# Altium PCB DCDC_SAUVC26.PcbDoc
Units mm, origin at the board's own origin, x right, y up, seen from the top; angles counter-clockwise.
Board outline 75 x 70 mm, 2 copper layers (Top Layer, Bottom Layer), stack 1.571 mm thick; 96 components, 44 nets, 294 pads, 153 vias.
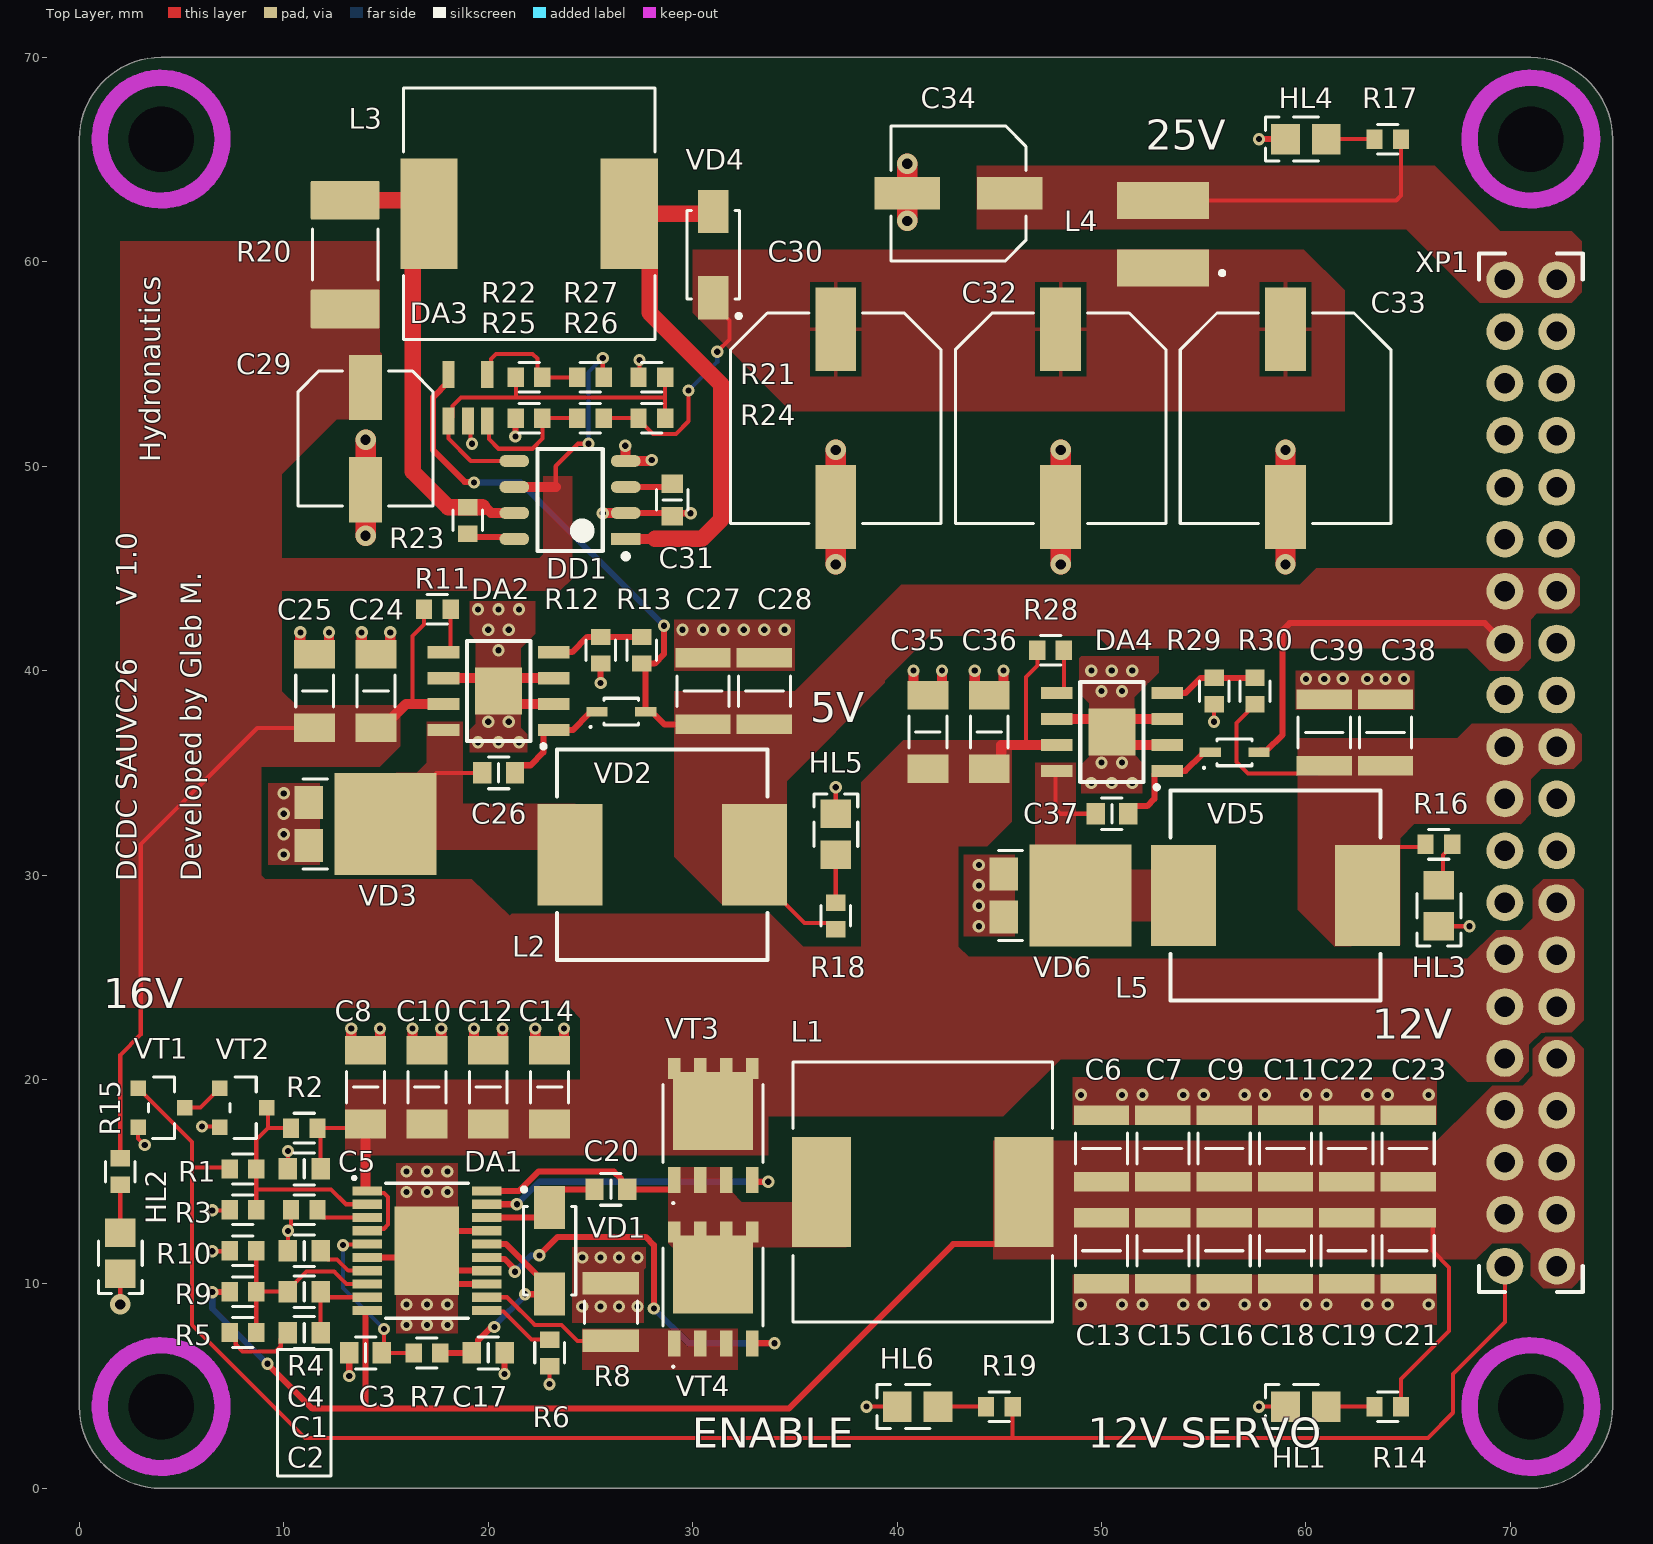
[diagram p0: Top Layer view]
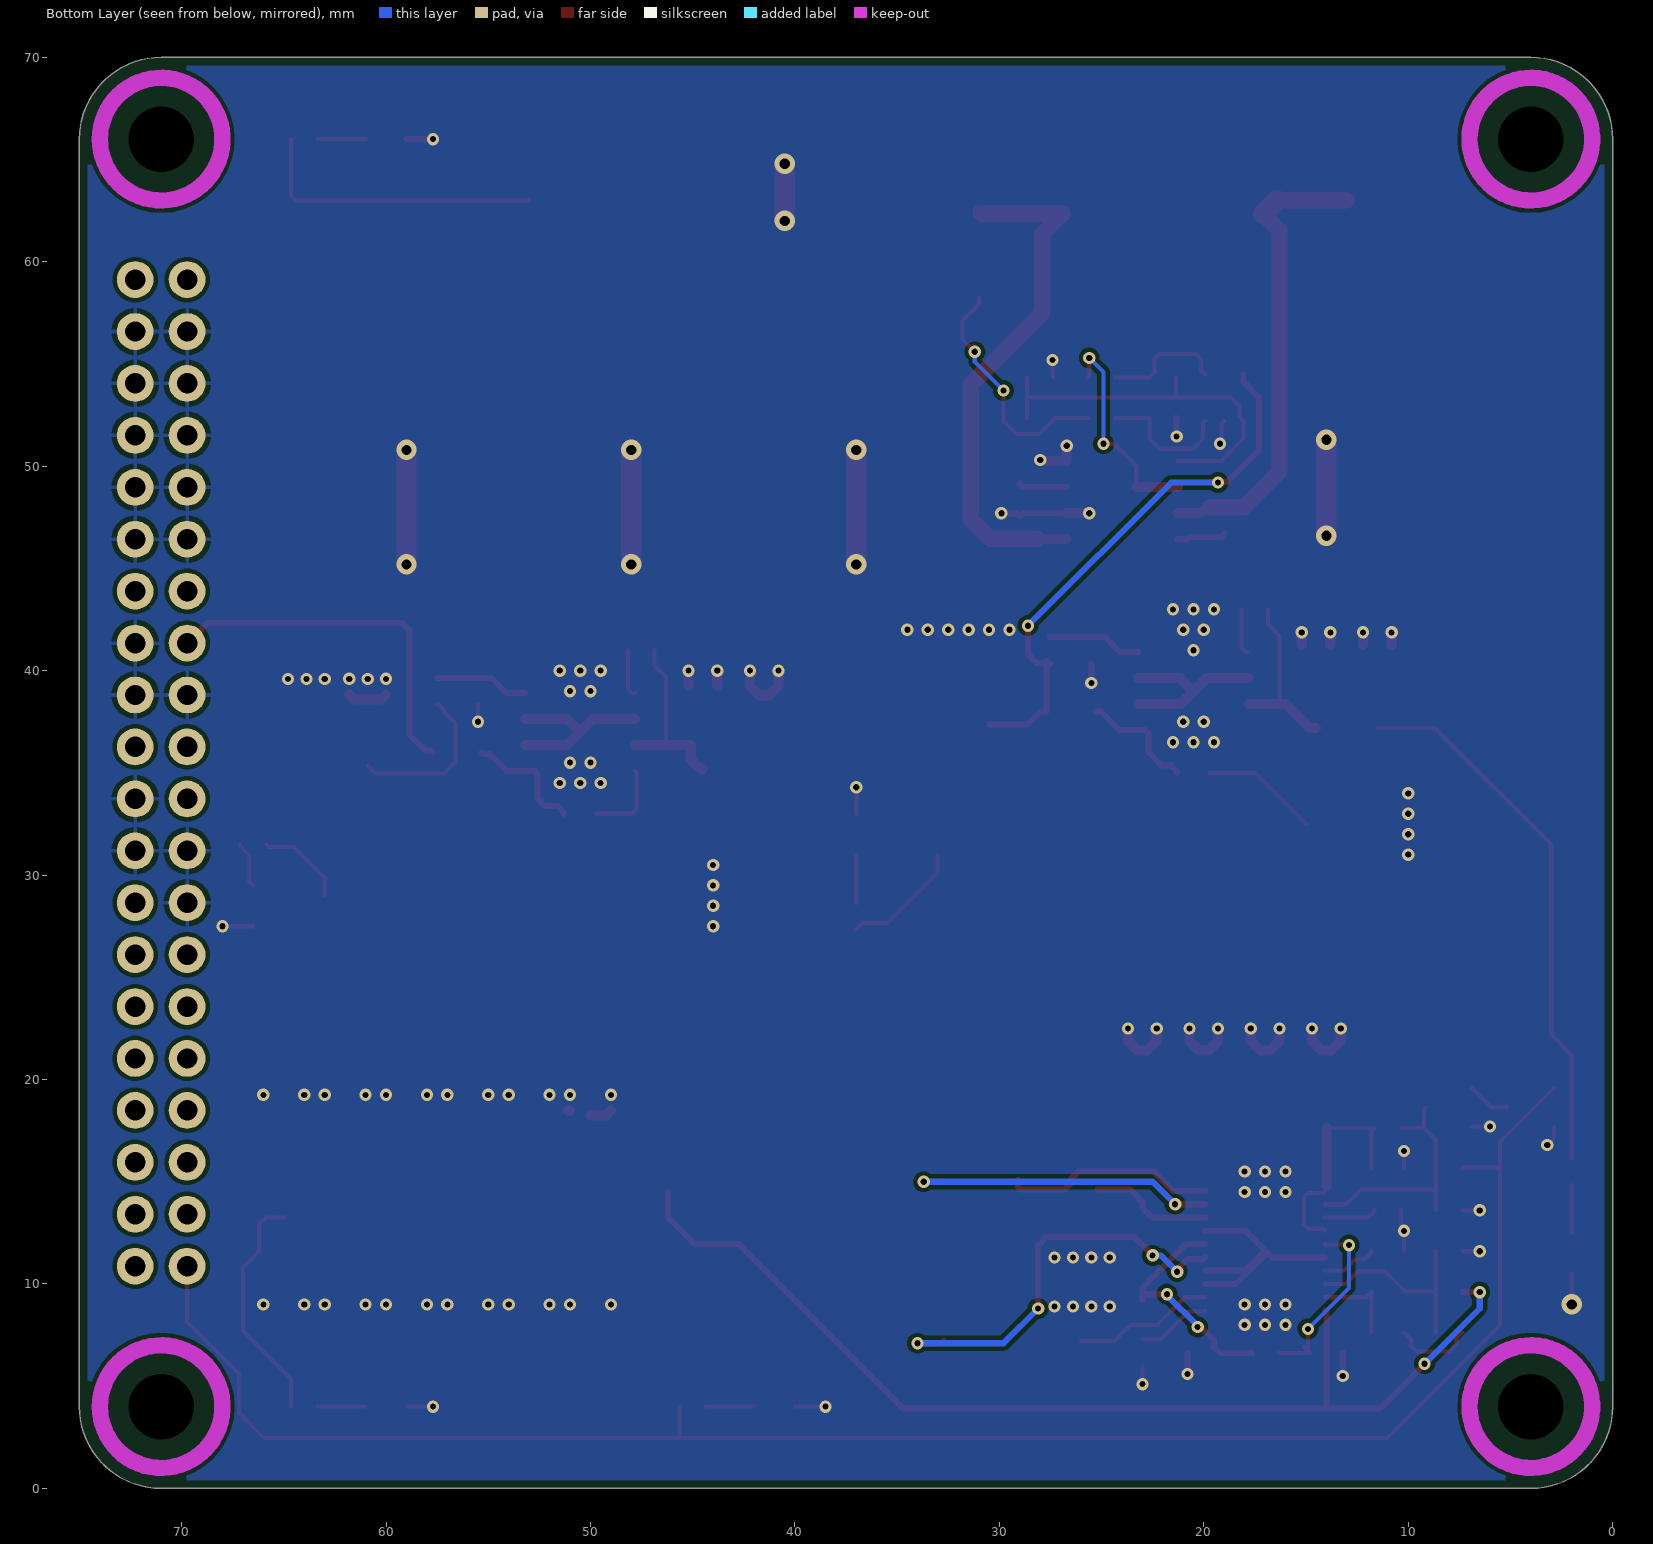
[diagram p1: Bottom Layer view, seen from below]

## Layer stack, top to bottom
Top Solder: solder mask 0.0102, Solder Resist, Dk 3.5
Top Layer: signal copper 0.0356
Dielectric 1: core 1.5, FR4, Dk 4.6
Bottom Layer: signal copper 0.0356
Bottom Solder: solder mask 0.0102, Solder Resist, Dk 3.5

## Board outline
4,0 cw(c4,4) 0,4 0,66 cw(c4,66) 4,70 71,70 cw(c71,66) 75,66 75,4 cw(c71,4) 71,0

## Design rules (kind name [scope] priority, off if disabled: settings)
AcuteAngle [All] p1: minimum=3.50000000000000E+0001 checktracksonly=FALSE
BoardOutlineClearance "BoardOutlineClearance 2" [All] p1: gap=0.4 ignorepadtopadclearanceinfootprint=FALSE except(0: Arc-SplitContinuation Track-SplitContinuation SMDPad-SplitContinuation THPad-SplitContinuation Via-SplitContinuation Fill-SplitContinuation Poly-SplitContinuation Region-SplitContinuation Text-SplitContinuation) // V-Cut
Clearance "Clearance-1 1 Oz" [All] p1: gap=0.2 ignorepadtopadclearanceinfootprint=FALSE except(0.25: Arc-Hole Track-Hole SMDPad-Hole THPad-Hole Via-Hole Fill-Hole Poly-Hole Region-Hole Text-Hole) // Standart
DiffPairsRouting "DiffPairsRouting 1 Oz" [All] p1: maxlimit=0.254 minlimit=0.2 mostfreqgap=0.254 toplayer_minwidth=0.2 toplayer_maxwidth=0.381 toplayer_prefwidth=0.381 bottomlayer_minwidth=0.2 bottomlayer_maxwidth=0.381 bottomlayer_prefwidth=0.381 maxuncoupledlength=12.7
HoleSize "Minimum HoleSize VIA 1" [IsVia] p1: absolutevalues=TRUE maxlimit=5.9 minlimit=0.3 maxpercent=80.000 minpercent=20.000 // Standart
HoleToHoleClearance Hole2HoleClearance [All] p1: gap=0.25 allowstackedmicrovias=FALSE
MinimumAnnularRing "Minimum AR VIA Standart" [IsVia] p1: minimumring=0.15
MinimumAnnularRing "Minimum AR PAD Standart" [IsPAD] p2: minimumring=0.2
MinimumAnnularRing "Minimum AR VIA Advance" [IsVia] p3: minimumring=0.1
MinimumAnnularRing "Minimum AR PAD Advance" [IsPAD] p4: minimumring=0.15
MinimumSolderMaskSliver "SolderMask Bridge Standart" [All] p1: minsoldermaskwidth=0.15 // All Masks
PlaneClearance "PlaneClearance 1 Oz" [All] p1: clearance=0.2
PlaneConnect "TermalConnect-1 1 Oz" [All] p1: pad.planeconnectstyle=Relief pad.reliefexpansion=0.2 pad.reliefentries=4 pad.reliefconductorwidth=0.5 pad.reliefairgap=0.2 via.planeconnectstyle=Direct via.reliefexpansion=0.2 via.reliefentries=4 via.reliefconductorwidth=0.2 via.reliefairgap=0.2 // Standart
PolygonConnect [HasFootprint('ECAP_SMD_10,3x10,3')] p1: thpad.connectstyle=Relief thpad.reliefconductorwidth=0.2 thpad.reliefentries=4 thpad.polygonreliefangle="90 Angle" thpad.airgapwidth=0.25 smdpad.connectstyle=Relief smdpad.reliefconductorwidth=0.2 smdpad.reliefentries=4 smdpad.polygonreliefangle="90 Angle" smdpad.airgapwidth=0.25 via.connectstyle=Direct via.reliefconductorwidth=0.254 via.reliefentries=4 via.polygonreliefangle="90 Angle" via.airgapwidth=0.254
PolygonConnect PolygonConnect_GND [InNet('GND')] p2: thpad.connectstyle=Relief thpad.reliefconductorwidth=0.2 thpad.reliefentries=4 thpad.polygonreliefangle="90 Angle" thpad.airgapwidth=0.25 smdpad.connectstyle=Direct smdpad.reliefconductorwidth=0.2 smdpad.reliefentries=4 smdpad.polygonreliefangle="90 Angle" smdpad.airgapwidth=0.25 via.connectstyle=Direct via.reliefconductorwidth=0.254 via.reliefentries=4 via.polygonreliefangle="90 Angle" via.airgapwidth=0.254
PolygonConnect "PolygonConnect-1 1 Oz" [All] p3: connectstyle=Direct reliefconductorwidth=0.5 reliefentries=4 polygonreliefangle="90 Angle" airgapwidth=0.2 // Standart
RoomDefinition DCDC_12V_Servo [InComponentClass('DCDC_12V_Servo')] p1 off: confinementstyle=ConfineIn formatcopy=TRUE lockcomponents=FALSE outline 2,6 67,6 67,21 2,21
RoomDefinition DCDC_35V [InComponentClass('DCDC_35V')] p2 off: confinementstyle=ConfineIn formatcopy=TRUE lockcomponents=TRUE outline 10,45 64,45 64,69 10,69
RoomDefinition DCDC_12V [InComponentClass('DCDC_12V')] p3 off: confinementstyle=ConfineIn formatcopy=TRUE lockcomponents=TRUE outline 40,24 65,24 65,42 40,42
RoomDefinition DCDC_5V [InComponentClass('DCDC_5V')] p4 off: confinementstyle=ConfineIn formatcopy=TRUE lockcomponents=TRUE outline 10,26 35,26 35,44 10,44
RoomDefinition Connectors [InComponentClass('Connectors')] p5 off: confinementstyle=ConfineIn formatcopy=TRUE lockcomponents=FALSE outline 68,10 74,10 74,62 68,62
RoutingCorners [All] p1 off: cornerstyle=45-Degree minsetback=2.54 maxsetback=2.54
RoutingVias [All] p1: holewidth=0.3 width=0.6 viastyle="Through Hole" minholewidth=0.3 minwidth=0.6 maxholewidth=0.5 maxwidth=1
SilkToSilkClearance Silk2SilkClearance [All] p1 off: silktosilkclearance=0.15
SilkToSolderMaskClearance Silk2SolderMaskClearance [IsPad] p1 off: minsilkscreentomaskgap=0.15 clearancetoexposedcopper=TRUE
SolderMaskExpansion [IsVia] p1: expansion=0.102 istentingtop=TRUE
SolderMaskExpansion "SolderMaskExpansion LDI" [All] p2: expansion=0.025 istentingtop=FALSE // Advance
SupplyNets "Schematic Supply Nets_2" [InNet('+25В')] p1: voltage=0.000
SupplyNets "Schematic Supply Nets_6" [InNet('+16В')] p2: voltage=0.000
SupplyNets "Schematic Supply Nets_5" [InNet('GND')] p3: voltage=0.000
SupplyNets "Schematic Supply Nets_4" [InNet('+12В_servo')] p4: voltage=0.000
SupplyNets "Schematic Supply Nets_3" [InNet('+5В')] p5: voltage=0.000
SupplyNets "Schematic Supply Nets" [InNet('+12В')] p6: voltage=0.000
UnRoutedNet [All] p1: checkbadconnections=TRUE
Width "Width 1 Oz" [All] p1: maxlimit=10 minlimit=0.2 preferedwidth=0.5 checkconnectedcopper=TRUE
20 further rules are at their usual default settings.

## Classes and differential pairs
component class DCDC_12V: C35 C36 C37 C38 C39 DA4 L5 R28 R29 R30 VD5 VD6
component class DCDC_35V: C29 C30 C31 C32 C33 C34 DA3 DD1 L3 L4 R20 R21 R22 R23 R24 R25 R26 R27 VD4
component class Connectors: HL1 HL2 HL3 HL4 HL5 HL6 R14 R15 R16 R17 R18 R19 XP1
component class DCDC_5V: C24 C25 C26 C27 C28 DA2 L2 R11 R12 R13 VD2 VD3
component class DCDC_12V_Servo: C1 C2 C3 C4 C5 C6 C7 C8 C9 C10 C11 C12 C13 C14 C15 C16 C17 C18 C19 C20 C21 C22 C23 DA1 L1 R1 R2 R3 R4 R5 R6 R7 R8 R9 R10 VD1 VT1 VT2 VT3 VT4

## Components (designator, comment, footprint, x,y, rotation, side; value= is the part's Value field where it differs from the comment)
C1 "Capacitor" 0603C 11,9.625 r180 top value="0,01 н"
C2 "Capacitor" 0603C 11,7.625 r180 top value="0,15 н"
C3 "Capacitor" 0603C 14,6.625 r0 top value="0,75 н"
C4 "Capacitor" 0603C 11,11.625 r0 top value="10 н"
C5 "Capacitor" 0603C 11,15.625 r0 top value="0,1 мк"
C6 "Capacitor" 1210C 50,16.625 r270 top value="22 мк"
C7 "Capacitor" 1210C 53,16.625 r270 top value="22 мк"
C8 "Capacitor" 1206C 14,19.625 r270 top value="2,2 мк"
C9 "Capacitor" 1210C 56,16.625 r270 top value="22 мк"
C10 "Capacitor" 1206C 17,19.625 r270 top value="2,2 мк"
C11 "Capacitor" 1210C 59,16.625 r270 top value="22 мк"
C12 "Capacitor" 1206C 20,19.625 r270 top value="2,2 мк"
C13 "Capacitor" 1210C 50,11.625 r90 top value="22 мк"
C14 "Capacitor" 1206C 23,19.625 r270 top value="2,2 мк"
C15 "Capacitor" 1210C 53,11.625 r90 top value="22 мк"
C16 "Capacitor" 1210C 56,11.625 r90 top value="22 мк"
C17 "Capacitor" 0603C 20,6.625 r0 top value="1 мк"
C18 "Capacitor" 1210C 59,11.625 r90 top value="22 мк"
C19 "Capacitor" 1210C 62,11.625 r90 top value="22 мк"
C20 "Capacitor" 0603C 26,14.625 r0 top value="1 мк"
C21 "Capacitor" 1210C 65,11.625 r90 top value="22 мк"
C22 "Capacitor" 1210C 62,16.625 r270 top value="22 мк"
C23 "Capacitor" 1210C 65,16.625 r270 top value="22 мк"
C24 "Capacitor" 1206C 14.509,39 r270 top value="4,7 мк"
C25 "Capacitor" 1206C 11.508,39 r270 top value="4,7 мк"
C26 "Capacitor" 0603C 20.508,35 r0 top value="10 н"
C27 "Capacitor" 1210C 30.508,39 r270 top value="22 мк"
C28 "Capacitor" 1210C 33.509,39 r270 top value="22 мк"
C29 "Capacitor" ECAP_SMD_6,6x6,6 14,51.35 r270 top value="100 мк"
C30 "Capacitor" ECAP_SMD_10,3x10,3 37,52.35 r270 top value="330 мк"
C31 "Capacitor" 0603C 29,48.35 r90 top value="1 н"
C32 "Capacitor" ECAP_SMD_10,3x10,3 48,52.35 r270 top value="330 мк"
C33 "Capacitor" ECAP_SMD_10,3x10,3 59,52.35 r270 top value="330 мк"
C34 "Capacitor" ECAP_SMD_6,6x6,6 43,63.35 r180 top value="100 мк"
C35 "Capacitor" 1206C 41.509,37 r270 top value="4,7 мк"
C36 "Capacitor" 1206C 44.509,37 r270 top value="4,7 мк"
C37 "Capacitor" 0603C 50.509,33 r0 top value="10 н"
C38 "Capacitor" 1210C 63.893,36.979 r270 top value="22 мк"
C39 "Capacitor" 1210C 60.894,36.979 r270 top value="22 мк"
DA1 "LM5116MH" HTSSOP-20 17,11.625 r0 top
DA2 "RT8279GSP" 8SOP(Exposed_Pad) 20.508,39 r180 top
DA3 "TS951ILT" SOt23-5 19,53.35 r90 top
DA4 "RT8279GSP" 8SOP(Exposed_Pad) 50.509,37 r180 top
DD1 "MC3306A" SOIC-8 24,48.35 r180 top
HL1 "LED" 0805D 60,4 r180 top
HL2 "LED" 0805D 2,11.5 r270 top
HL3 "LED" 0805D 66.5,28.5 r270 top
HL4 "LED" 0805D 60,66 r180 top
HL5 "LED" 0805D 37,32 r90 top
HL6 "LED" 0805D 41,4 r180 top
L1 "CDSPRH127-150M" SPRH127 41,14.625 r0 top value="15 мк"
L2 "IHLP4040DZER330M11" IHLP-4040 28.509,31 r0 top value="33 мк"
L3 "CDSPRH127-331M" 12.8x12.8 22,62.35 r0 top value="330 мк"
L4 "CDSP43-1R0M" 4.5x4_wired 53,61.35 r180 top value="1 мк"
L5 "IHLP4040DZER330M11" IHLP-4040 58.509,29 r0 top value="33 мк"
R1 "Resistor" 0603R 8,15.625 r0 top value=N/A
R2 "Resistor" 0603R 11,17.625 r0 top value="33 к"
R3 "Resistor" 0603R 8,13.625 r0 top value="5,6 к"
R4 "Resistor" 0603R 11,13.625 r0 top value="12,4 к"
R5 "Resistor" 0603R 8,7.625 r0 top value="180 к"
R6 "Resistor" 0603R 23,6.625 r270 top value="10 к"
R7 "Resistor" 0603R 17,6.625 r180 top value="470 к"
R8 "Resistor" 1210R 26,8.625 r270 top value="10 м"
R9 "Resistor" 0603R 8,9.625 r180 top value="10,7 к"
R10 "Resistor" 0603R 8,11.625 r0 top value="1,21 к"
R11 "Resistor" 0603R 17.508,43 r180 top value="1,0 к"
R12 "Resistor" 0603R 25.508,41 r90 top value="31,6 к"
R13 "Resistor" 0603R 27.508,41 r270 top value="100 к"
R14 "Resistor" 0603R 64,4 r0 top value="10 к"
R15 "Resistor" 0603R 2,15.5 r90 top value="27 к"
R16 "Resistor" 0603R 66.5,31.5 r180 top value="10 к"
R17 "Resistor" 0603R 64,66 r0 top value="33 к"
R18 "Resistor" 0603R 37,28 r270 top value="2,2 к"
R19 "Resistor" 0603R 45,4 r0 top value="2,2 к"
R20 "Resistor" 2512R 13,60.35 r270 top value=0,22
R21 "Resistor" 0603R 28,54.35 r0 top value=390
R22 "Resistor" 0603R 22,54.35 r0 top value="3,0 к"
R23 "Resistor" 0603R 19,47.35 r90 top value=180
R24 "Resistor" 0603R 28,52.35 r180 top value="7,5 к"
R25 "Resistor" 0603R 22,52.35 r180 top value="3,0 к"
R26 "Resistor" 0603R 25,52.35 r180 top value="24 к"
R27 "Resistor" 0603R 25,54.35 r180 top value="24 к"
R28 "Resistor" 0603R 47.509,41 r180 top value="1,0 к"
R29 "Resistor" 0603R 55.509,39 r90 top value="11 к"
R30 "Resistor" 0603R 57.509,39 r270 top value="100 к"
VD1 "ES1D-E3/61T" SMA 23,11.625 r270 top
VD2 "BAT54WS" SOD-323 26.508,38 r0 top
VD3 "10S45SP" TO-277 14,32.5 r0 top
VD4 "20MQ100" SMA 31,60.35 r90 top
VD5 "BAT54WS" SOD-323 56.509,36 r0 top
VD6 "10S45SP" TO-277 48,29 r0 top
VT1 "PDTC114ET" SOT23-3 4,18.625 r0 top
VT2 "PDTC114ET" SOT23-3 8,18.625 r0 top
VT3 "SIR426DP-T1-GE3" PowerPAK_SO-8 31,17.625 r90 top
VT4 "SIR426DP-T1-GE3" PowerPAK_SO-8 31,9.625 r90 top
XP1 "PLD-40" PLD40 71,35 r90 top

## Footprints (in the part's own frame and the unit in brackets; to place one, negate y for a bottom-side part, rotate by r counter-clockwise, add the part's x,y. Pads: shape width x height; smd on the part's side, far side on the other; paste and mask are expansions set on the pad)
4.5x4_wired [mm]
  rect 4.5x1.8 smd: 1(0,1.65) 2(0,-1.65)
  silkscreen extent -3,1.8 -2.8,2, body extent -2.25,-2.25 2.25,2.25, height 3.2
8SOP(Exposed_Pad) [mm]
  rect 1.55x0.6 smd: 1(-2.7,1.905) 2(-2.7,0.635) 3(-2.7,-0.635) 4(-2.7,-1.905) 5(2.7,-1.905) 6(2.7,-0.635) 7(2.7,0.635) 8(2.7,1.905)
  rect 2.3x2.3 smd paste-2: 9(0,0)
  silkscreen extent -1.55,-2.45 1.55,2.45, body extent -3,-2.45 3,2.45, height 1.75
12.8x12.8 [mm] "Индуктивность"
  rect 2.8x5.4 smd: 1(-4.9,0) 2(4.9,0)
  silkscreen extent -6.15,-6.15 6.15,6.15, body extent -6.15,-6.15 6.15,6.15, height 6
0603C [mm] "Chip Resistor, 2-Leads, Body 1,40x0,80mm, IPC Medium Density"
  rect 0.9x1.05 smd: 1(-0.8,0) 2(0.8,0)
  silkscreen extent -0.5,-0.77 0.5,0.77, body extent -0.85,-0.45 0.85,0.45, height 0.9
0603R [mm] "Chip Resistor, 2-Leads, Body 1.60x0.85mm, IPC Medium Density"
  rect 0.8x0.95 smd: 1(-0.65,0) 2(0.65,0)
  silkscreen extent -0.5,-0.72 0.5,0.72, body extent -0.87,-0.47 0.88,0.48, height 0.9
0805D [mm]
  rect 1.4x1.5 smd: 1(-1,0) 2(1,0)
  silkscreen extent -0.6,-1.07 1.97,1.07, body extent -1.07,-0.7 1.07,0.7, height 0.7
1206C [mm]
  rect 1.4x2 smd paste+0: 1(-1.8,0) 2(1.8,0)
  silkscreen extent -0.77,-0.92 0.77,0.92, body extent -1.6,-0.74 1.6,0.86, height 1.59
1210C [mm]
  rect 0.954x2.706 smd paste+0: 1(-1.625,0) 2(1.625,0)
  silkscreen extent -0.75,-1.28 0.75,1.28, body extent -2.35,-1.6 2.35,1.6, height 0.25
1210R [mm]
  rect 1.1x2.77 smd: 1(-1.413,0) 2(1.413,0)
  silkscreen extent -0.55,-1.3 0.55,1.3, body extent -1.55,-1.3 1.55,1.3, height 0.65
2512R [mm]
  rrect7% 1.9x3.37 smd: 1(-2.66,0) 2(2.66,0)
  silkscreen extent -1.25,-1.6 1.25,1.6, body extent -3.17,-1.6 3.17,1.6, height 0.65
ECAP_SMD_6,6x6,6 [mm]
  rect 3.2x1.6 smd: 1(-2.5,0) 2(2.5,0)
  silkscreen extent -3.3,-3.3 3.3,3.3, body extent -3.65,-3.3 3.65,3.3, height 7.7
ECAP_SMD_10,3x10,3 [mm]
  rect 4.1x2 smd: 1(-4.35,0) 2(4.35,0)
  silkscreen extent -5.15,-5.15 5.15,5.15, body extent -5.85,-5.15 5.85,5.15, height 10.21
HTSSOP-20 [mm]
  rect 1.45x0.45 smd: 1(-2.925,2.925) 2(-2.925,2.275) 3(-2.925,1.625) 4(-2.925,0.975) 5(-2.925,0.325) 6(-2.925,-0.325) 7(-2.925,-0.975) 8(-2.925,-1.625) 9(-2.925,-2.275) 10(-2.925,-2.925) 11(2.925,-2.925) 12(2.925,-2.275) 13(2.925,-1.625) 14(2.925,-0.975) 15(2.925,-0.325) 16(2.925,0.325) 17(2.925,0.975) 18(2.925,1.625) 19(2.925,2.275) 20(2.925,2.925)
  rect 3.15x4.35 smd: 21(0,0)
  silkscreen extent -3.61,-3.3 2.03,3.61, body extent -3.21,-3.25 3.21,3.25, height 1
IHLP-4040 [mil]
  rect 125x195 smd paste+0 mask+0: 1(-177.5,0) 2(177.5,0)
  silkscreen extent -202,-202 202,202, body extent -244,-206 244,206, height 10
PLD40 [mm]
  round 1.8 hole 1: 1(24.13,1.27) 2(24.13,-1.27) 3(21.59,1.27) 4(21.59,-1.27) 5(19.05,1.27) 6(19.05,-1.27) 7(16.51,1.27) 8(16.51,-1.27) 9(13.97,1.27) 10(13.97,-1.27) 11(11.43,1.27) 12(11.43,-1.27) 13(8.89,1.27) 14(8.89,-1.27) 15(6.35,1.27) 16(6.35,-1.27) 17(3.81,1.27) 18(3.81,-1.27) 19(1.27,1.27) 20(1.27,-1.27) 21(-1.27,1.27) 22(-1.27,-1.27) 23(-3.81,1.27) 24(-3.81,-1.27) 25(-6.35,1.27) 26(-6.35,-1.27) 27(-8.89,1.27) 28(-8.89,-1.27) 29(-11.43,1.27) 30(-11.43,-1.27) 31(-13.97,1.27) 32(-13.97,-1.27) 33(-16.51,1.27) 34(-16.51,-1.27) 35(-19.05,1.27) 36(-19.05,-1.27) 37(-21.59,1.27) 38(-21.59,-1.27) 39(-24.13,1.27) 40(-24.13,-1.27)
  silkscreen extent -25.4,-2.54 25.4,2.54, body extent -25.4,-2.54 25.4,2.54, height 8.44
PowerPAK_SO-8 [mm]
  rect 1.27x0.61 smd: 1(-2.543,1.905) 2(-2.543,0.635) 3(-2.543,-0.635) 4(-2.543,-1.905)
  rect 1.02x0.61 smd: 5(2.921,-1.905) 8(2.921,1.905)
  rect 0.71x0.61 smd: 6(3.077,-0.635) 7(3.077,0.635)
  rect 3.81x3.91 smd: 9(0.83,0)
  silkscreen extent -3.72,-2.45 2.13,2.45, body extent -2.95,-2.58 3.2,2.58, height 1.12
SMA [mm]
  rect 2.12x1.5 smd: 1(2.115,0) 2(-2.115,0)
  silkscreen extent -3.1,-1.35 2.16,1.28, body extent -2.57,-1.28 2.57,1.28, height 2.5
SOD-323 [mm]
  rect 1.04x0.46 smd: 1(1.19,0) 2(-1.19,0)
  silkscreen extent -1.55,-0.8 0.85,0.65, body extent -1.25,-0.65 1.25,0.65, height 1.2
SOIC-8 [mm] "for operational amplifier"
  rect 1.45x0.6 smd: 1(-2.725,1.905)
  oval 1.45x0.6 smd: 2(-2.725,0.635) 3(-2.725,-0.635) 4(-2.725,-1.905) 5(2.725,-1.905) 6(2.725,-0.635) 7(2.725,0.635) 8(2.725,1.905)
  silkscreen extent -2.85,-2.5 1.6,2.88, body extent -3,-2.5 3,2.5, height 1.75
SOT23-3 [mil]
  rect 30x30 smd: 1(-44.29,37.4) 2(-44.29,-37.6) 3(45.71,-0.1)
  silkscreen extent -25,-59 26,59, body extent -48,-60 50,59, height 41
SOt23-5 [mm]
  rect 1.32x0.59 smd: 1(-1.145,0.95) 2(-1.145,0) 3(-1.145,-0.95) 4(1.145,-0.95) 5(1.145,0.95)
  body extent -1.4,-1.45 1.4,1.45, height 1.45
SPRH127 [mm]
  rect 2.9x5.4 smd: 1(-4.696,-0.127) 2(5.204,-0.127)
  silkscreen extent -6.1,-6.48 6.6,6.22, body extent -5.75,-6.13 6.25,5.87, height 8.05
TO-277 [mm]
  rect 1.4x1.6 smd: 1(-2.775,-1.05) 1(-2.775,1.05)
  rect 5x5 smd paste-3: 2(0.975,0)
  silkscreen extent -3.05,-2.2 -1.88,2.2, body extent -3.25,-2.3 3.25,2.3, height 1.2

## Part data
C1: library part Capacitor_0,01n_10_50V_X7R_0603C, "Конденсатор", Capacity (nF)=0,01, Dielectric=X7R, Tolerance=0,1, Voltage (V)=50, Library Path2=Schematic\Capacitor.SchLib, Part Number=Capacitor_0,01n_10_50V_X7R_0603C
C2: library part Capacitor_0,15n_10_50V_X7R_0603C, "Конденсатор", Capacity (nF)=0,15, Dielectric=X7R, Tolerance=0,1, Voltage (V)=50, Library Path2=Schematic\Capacitor.SchLib, Part Number=Capacitor_0,15n_10_50V_X7R_0603C
C3: library part Capacitor_0,75n_10_50V_X7R_0603C, "Конденсатор", Capacity (nF)=0,75, Dielectric=X7R, Tolerance=0,1, Voltage (V)=50, Library Path2=Schematic\Capacitor.SchLib, Part Number=Capacitor_0,75n_10_50V_X7R_0603C
C4 C26 C37: library part Capacitor_10n_10_50V_X7R_0603C, "Конденсатор", Capacity (nF)=10, Dielectric=X7R, Tolerance=0,1, Voltage (V)=50, Library Path2=Schematic\Capacitor.SchLib, Part Number=Capacitor_10n_10_50V_X7R_0603C
C5: library part Capacitor_0,1u_10_50V_X7R_0603C, "Конденсатор", Capacity (nF)=100, Dielectric=X7R, Tolerance=0,1, Voltage (V)=50, Library Path2=Schematic\Capacitor.SchLib, Part Number=Capacitor_0,1u_10_50V_X7R_0603C
C6 C7 C9 C11 C13 C15 C16 C18 C19 C21 C22 C23 C27 C28 C38 C39: library part Capacitor_22u_10_25V_X7R_1210C, "Конденсатор", Capacity (nF)=22000, Dielectric=X7R, Tolerance=0,1, Voltage (V)=25, Library Path2=Schematic\Capacitor.SchLib, Part Number=Capacitor_22u_10_25V_X7R_1210C
C8 C10 C12 C14: library part Capacitor_2,2u_10_50V_X7R_1206C, "Конденсатор", Capacity (nF)=2200, Dielectric=X7R, Tolerance=0,1, Voltage (V)=50, Library Path2=Schematic\Capacitor.SchLib, Part Number=Capacitor_2,2u_10_50V_X7R_1206C
C17 C20: library part Capacitor_1u_10_50V_X7R_0603C, "Конденсатор", Capacity (nF)=1000, Dielectric=X7R, Tolerance=0,1, Voltage (V)=50, Library Path2=Schematic\Capacitor.SchLib, Part Number=Capacitor_1u_10_50V_X7R_0603C
C24 C25 C35 C36: library part Capacitor_4,7u_10_50V_X7R_1206C, "Конденсатор", Capacity (nF)=4700, Dielectric=X7R, Tolerance=0,1, Voltage (V)=50, Library Path2=Schematic\Capacitor.SchLib, Part Number=Capacitor_4,7u_10_50V_X7R_1206C
C29 C34: library part JCK1V101, "Конденсатор алюминиевый электролитический 100мкФ 35В 20% SMD 6,6x6,6 мм", Capacity (uF)=100, Tolerance=20, Voltage (V)=35, Part Number=JCK1V101, Type="SMD Aluminum"
C30 C32 C33: library part JCK1V331, "Конденсатор алюминиевый электролитический 1000мкФ 25В 20% Low ESR 1100мА SMD12.5x13.5мм", Capacity (uF)=330, Tolerance=20, Voltage (V)=35, Part Number=JCK1V331, Type="SMD Aluminum"
C31: library part Capacitor_1n_10_50V_X7R_0603C, "Конденсатор", Capacity (nF)=1, Dielectric=X7R, Tolerance=0,1, Voltage (V)=50, Library Path2=Schematic\Capacitor.SchLib, Part Number=Capacitor_1n_10_50V_X7R_0603C
DA1: "dc-dc понижающий adj 6-100v", Manufacturer_Part_Number=LM5116MH/NOPB, Part Number=LM5116MH
DA2 DA4: "Преобразователь постоянного тока понижающий подстраиваемый выход 5А", Part Number=RT8279GSP
DA3: "Операционный усилитель Rail-to-Rail, 1-канальный", Part Number=TS951ILT
DD1: "DC-DC понижающий/повышающий преобразователь, вход: 3 - 40 В, выход: 1,25 - 40 В 1,5 А", Part Number=MC3306A
HL1 HL2 HL3 HL4 HL5 HL6: "Светодиод", Color={Цвет}, Part Number=LED
L1: "Индуктивность на 15 мкГн, номинальный ток 8,4 А", Current (A)=8,4, Inductance (μH)=15, Part Number=CDSPRH127-150M
L2 L5: "ЧИП-индуктивность экранированная 33мкГн ±20% 4,4A 94,5мОм 4040", Current (A)=4,4, Inductance (μH)=33, Part Number=IHLP4040DZER330M11
L3: "Индуктивность на 330 мкГн, номинальный ток 1,79 A", Current (A)=1,79, Inductance (μH)=330, Part Number=CDSPRH127-331M
L4: "Индуктивность на 1 мкГн, номинальный ток 4,3 A", Current (A)=4,3, Inductance (μH)=1, Part Number=CDSP43-1R0M
R1: library part res_0603_N/A, "посадочное место 0603 под перемычку", Tolerance=1%, Part Number=res_0603_N/A
R2 R17: library part Resistor_33k_1_0603, "Резистор номиналом 33 кОм и точностью 1%", Tolerance=1%, Part Number=Resistor_33k_1_0603
R3: library part Resistor_5.6k_1_0603, "Резистор номиналом 5,6 кОм 1%", Tolerance=1%, Part Number=Resistor_5.6k_1_0603
R4: library part Resistor_12.4k_1_0603, "Резистор номиналом 12,4 кОм и точностью 1%", Tolerance=1%, Part Number=Resistor_12.4k_1_0603
R5: library part Resistor_180k_1_0603, "Резистор номиналом 180 кОм и точностью 1%", Tolerance=1%, Part Number=Resistor_180k_1_0603
R6 R14 R16: library part Resistor_10k_1_0603, "Резистор номиналом 10 кОм и точностью 1%", Tolerance=1%, Part Number=Resistor_10k_1_0603
R7: library part Resistor_470k_1_0603, "Резистор номиналом 470 кОм и точностью 1%", Tolerance=1%, Part Number=Resistor_470k_1_0603
R8: library part RL1210FR-070R01L, "Резистор номиналом 10 мОм, точностью 1%, 0.5Вт", Tolerance=1%, Part Number=RL1210FR-070R01L
R9: library part Resistor_10.7k_1_0603, "Резистор номиналом 10,7 кОм и точностью 1%", Tolerance=1%, Part Number=Resistor_10.7k_1_0603
R10: library part Resistor_1.21k_1_0603, "Резистор номиналом 1,21 кОм и точностью 1%", Tolerance=1%, Part Number=Resistor_1.21k_1_0603
R11 R28: library part Resistor_1.0k_1_0603, "Резистор номиналом 1,0 кОм и точностью 1%", Tolerance=1%, Part Number=Resistor_1.0k_1_0603
R12: library part Resistor_31.6k_1_0603, "Резистор номиналом 31,6 кОм и точностью 1%", Tolerance=1%, Part Number=Resistor_31.6k_1_0603
R13 R30: library part Resistor_100k_1_0603, "Резистор номиналом 100 кОм и точностью 1%", Tolerance=1%, Part Number=Resistor_100k_1_0603
R15: library part Resistor_27k_1_0603, "Резистор номиналом 27 кОм и точностью 1%", Tolerance=1%, Part Number=Resistor_27k_1_0603
R18 R19: library part Resistor_2.2k_1_0603, "Резистор номиналом 2,2 кОм и точностью 1%", Tolerance=1%, Part Number=Resistor_2.2k_1_0603
R20: library part Resistor_0.22_1_2512, "Резистор номиналом 0,22 Ом и точностью 1%", Tolerance=1%, Part Number=Resistor_0.22_1_2512
R21: library part Resistor_390_1_0603, "Резистор номиналом 390 Ом 1%", Tolerance=1%, Part Number=Resistor_390_1_0603
R22 R25: library part Resistor_3.0k_1_0603, "Резистор номиналом 3,0 кОм и точностью 1%", Tolerance=1%, Part Number=Resistor_3.0k_1_0603
R23: library part Resistor_180_1_0603, "Резистор номиналом 180 Ом и точностью 1%", Tolerance=1%, Part Number=Resistor_180_1_0603
R24: library part Resistor_7.5k_1_0603, "Резистор номиналом 7,5 кОм 1%", Tolerance=1%, Part Number=Resistor_7.5k_1_0603
R26 R27: library part Resistor_24k_1_0603, "Резистор номиналом 24 кОм и точностью 1%", Tolerance=1%, Part Number=Resistor_24k_1_0603
R29: library part Resistor_11k_1_0603, "Резистор номиналом 11 кОм и точностью 1%", Tolerance=1%, Part Number=Resistor_11k_1_0603
VD1: "Диод 1A 200V", Current (A)=1, Repetitive peak reverse voltage (Vrrm)=200, Part Number=ES1D-E3/61T
VD2 VD5: "Диод шоттки на 30 В, ном. ток 0.2 А", Current (A)=0.2, Voltage nominal (V)=30, Part Number=BAT54WS
VD3 VD6: "Диод шоттки на 45 В, ном. ток 10 А", Current (A)=10, Voltage nominal (V)=45, Part Number=10S45SP
VD4: "Диод шоттки на 100 В, ном. ток 2 А", Current (A)=2, Voltage nominal (V)=100, Part Number=20MQ100
VT1 VT2: "цифровой npn 50в 100мА", Part Number=PDTC114ET, Напряжение С-И/К-Э="50 В", Ток макс#="0, 1 А"
VT3 VT4: "Транзистор полевой MOSFET N-канальный 40В 41.7Вт", Part Number=SIR426DP-T1-GE3, Напряжение С-И/К-Э="40 В"
XP1: "Гребенка 40 пинов", Value1={Value}, Datasheet=https://static.chipdip.ru/lib/177/DOC040177951.pdf, Part Number=PLD-40, System=Connector, Value2={Value}, Value3={Value}, Value4={Value}, Value5={Value}, Value6={Value}, Value7={Value}, Value8={Value}, Value9={Value}, Value10={Value}, Value11={Value}, Value12={Value}, Value13={Value}, Value14={Value}, Value15={Value}, Value16={Value}, Value17={Value}, Value18={Value}, Value19={Value}, Value20={Value}

## Free pads (board coordinates)
  round 0 hole 3.2 unplated mask+1.7: 5(4,4) 5(4,66) 5(71,4) 5(71,66)

## Via types
v1: diameter 0.6, hole 0.3, Top Layer to Bottom Layer, tented both sides, 142 vias
v2: diameter 1, hole 0.5, Top Layer to Bottom Layer, tented both sides, 11 vias

## Nets (pads, with @x,y where several pads share a name; then routed paths per layer and width w, separated by ;. In a path a pad name is that pad's centre, name@x,y a point inside that pad or via, vN(x,y) a via of type N, cw(c..) or ccw(c..) an arc to the next point about the centre after c; other vN are vias at no path point)
+5В: C27.2 C28.2 DA3.5 L2.2 R13.2 R18.2 VD2.1 VD5.1 XP1.13 XP1.14 XP1.15 | length 51.4
  Top Layer w0.2: L2.2 33.017,30.111 35.478,27.65 36.7,27.65 R18.2
  Top Layer w0.3: DA3.5 18.05,54.13 17.3,53.38 17.3,50.788 18.85,49.238 19.262,49.238 v1(19.3,49.2) ; R13.2@27.698,40.465 R13.2@27.698,40.35 ; v1(28.6,42.2) 28.6,40.817 28.133,40.35 R13.2@27.698,40.35 ; C27.2 28.614,37.375 27.989,38 VD2.1 R13.2@27.698,40.16 ; VD5.1 57.779,36.08 58.069,36.08 58.856,36.867 58.856,41.979 59.207,42.33 68.75,42.33 XP1.15 ; R13.2@27.698,40.16 R13.2@27.698,40.35 ; R13.2@27.698,40.16 R13.2 R13.2@27.698,40.35
  Bottom Layer w0.3: v1(19.3,49.2) 21.6,49.2 v1(28.6,42.2)
+12В: C38.2 C39.2 L5.2 R16.2 R30.2 XP1.19 XP1.20 XP1.21 | length 12.3
  Top Layer w0.2: R30.2 57.434,38.35 57.134,38.05 57.134,37.975 56.6,37.441 56.6,35.534 57.157,34.977 60.516,34.977 C39.2 ; L5.2 63.017,29.889 64.505,31.377 65.727,31.377 R16.2
+12В_servo: C6.2 C7.2 C9.2 C11.2 C13.2 C15.2 C16.2 C18.2 C19.2 C21.2 C22.2 C23.2 DA1.10 L1.2 R9.2 R14.2 XP1.32 XP1.33 XP1.34 XP1.35 XP1.36 XP1.37 XP1.38 XP1.40 | length 64.9
  Top Layer w0.2: R9.2@7.325,9.6 R9.2 ; R14.2 64.65,5.35 67,7.7 67,10.813 66.203,11.61 66.203,12.923 65.876,13.25 C21.2
  Top Layer w0.3: v1(6.5,9.6) R9.2@7.325,9.6 ; v1(9.2,6.1) 11.4,3.9 14,3.9 ; DA1.10 14,8.625 14,3.9 ; L1.2 46.204,13.248 44.904,11.948 42.748,11.948 34.7,3.9 14,3.9
  Bottom Layer w0.3: v1(6.5,9.6) 6.5,8.8 v1(9.2,6.1)
+16В: C5.2 C8.2 C10.2 C12.2 C14.2 C24.2 C25.2 C29.1 C35.2 C36.2 DA1.1 DA1.4 DA2.7 DA4.7 DD1.6 R2.2 R11.2 R15.2 R20.2 R27.1 R28.2 VT3.5 VT3.6 VT3.7 VT3.8 VT3.9 XP1.26 XP1.27 XP1.28 XP1.29 XP1.30 XP1.31 | length 66.1
  Top Layer w0.2: R15.2 2,21.2 3,22.2 3,31.5 8.7,37.2 C25.2 ; C5.2 11.8,17.475 R2.2 C8.2@14,17.625 ; 14,14.8 14,14.625 DA1.1 14.176,14.449 14.9,14.449 15.1,14.249 15.1,12.901 14.9,12.701 14.176,12.701 DA1.4 ; 16.3,38.365 16.3,41.7 16.859,42.259 R11.2 ; 23.3,48.985 23.3,50 24.4,51.1 v1(24.9,51.1) ; v1(25.6,55.3) 25.6,54.4 R27.1 ; 46.451,36.365 46.3,36.516 46.3,39.7 46.859,40.259 R28.2
  Top Layer w0.5: 14,14.8 C8.2@14,17.625 ; C24.2 14.808,37.2 15.973,38.365 16.3,38.365 DA2.7 ; DD1.6 23.3,48.985 ; C36.2 44.644,35.2 45.094,35.65 45.094,36.365 46.451,36.365 DA4.7
  Bottom Layer w0.2: v1(24.9,51.1) 24.9,54.6 v1(25.6,55.3)
+25В: C34.1 L4.2 R17.2 XP1.1 XP1.2 | length 14.5
  Top Layer w0.2: L4.2 64.416,63 64.65,63.234 R17.2
COMP: C1.1 C2.1 DA1.9 | length 4.4
  Top Layer w0.2: C2.1 C1.1 12.075,9.35 DA1.9
CS: DA1.12 R8.2 VT4.1 VT4.2 VT4.3 | length 7
  Top Layer w0.2: DA1.12 20.926,9.35 22.276,8 23.574,8 24.362,7.212 R8.2
DEMB: DA1.11 R6.1 | length 3.7
  Top Layer w0.2: DA1.11 19.975,8.65 20.75,8.65 22.125,7.275 R6.1
Enable: R1.1 R19.2 VT1.1 XP1.39 | length 88.8
  Top Layer w0.2: VT1.1 5.5,16.95 5.5,15.7 ; R1.1 7.275,15.7 5.5,15.7 ; R19.2 45.65,2.509 45.6,2.459 ; XP1.39 69.73,8.13 67.2,5.6 67.2,3.7 65.959,2.459 45.6,2.459 ; 5.5,15.7 5.5,8 11.041,2.459 45.6,2.459
FB: C1.2 DA1.8 R5.2 R9.1 R10.2 | length 10.1
  Top Layer w0.2: R5.2 R9.1 ; R10.2 R9.1 ; DA1.8 13.066,10 12.466,10.6 11.1,10.6 10.2,9.7 C1.2 R9.1
GND: C3.1 C4.1 C5.1 C6.1 C7.1 C8.1 C9.1 C10.1 C11.1 C12.1 C13.1 C14.1 C15.1 C16.1 C17.2 C18.1 C19.1 C21.1 C22.1 C23.1 C24.1 C25.1 C27.1 C28.1 C29.2 C30.2 C31.1 C32.2 C33.2 C34.2 C35.1 C36.1 C38.1 C39.1 DA1.6 DA1.13 DA1.14 DA1.17 DA1.21 DA2.2 DA2.3 DA2.6 DA2.9 DA3.2 DA4.2 DA4.3 DA4.6 DA4.9 DD1.2 DD1.4 HL1.2 HL2.2 HL3.2 HL4.2 HL5.2 HL6.2 R3.1 R4.1 R6.2 R8.1 R10.1 R12.1 R21.1 R25.2 R29.1 VD3.1 VD6.1 VT1.2 VT2.2 XP1.3 XP1.4 XP1.5 XP1.6 XP1.7 XP1.8 XP1.9 XP1.10 XP1.11 XP1.12 XP1.16 XP1.17 XP1.18 XP1.22 XP1.23 XP1.24 XP1.25 | length 107.3
  Top Layer w0.2: v2(2,9) HL2.2 ; VT1.2 2.875,17.125 v1(3.2,16.8) ; v1(6,17.7) 6.845,17.7 VT2.2 ; v1(6.5,11.6) 7.325,11.6 R10.1 ; v1(6.5,13.6) 7.325,13.6 R3.1 ; C4.1 v1(10.2,12.6) 10.2,12.708 10.35,12.858 R4.1 ; C5.1 v1(10.2,16.5) ; DA3.2 19.123,52.082 19.123,51.177 v1(19.2,51.1) ; v1(23,5.1) R6.2 ; R21.1 27.4,54.4 v1(27.4,55.2) ; HL5.2 v1(37,34.3) ; v1(38.5,4) HL6.2 ; v1(55.5,37.5) 55.5,38.341 R29.1 ; v1(57.7,4) HL1.2 ; HL3.2 v1(68,27.5)
  Top Layer w0.3: v1(13.2,5.5) C3.1 ; DA1.6 16.675,11.3 DA1.21 ; DA1.13 18.425,10 17,11.425 DA1.21 ; DA1.14 17.975,10.65 DA1.21 ; DA1.17 17.975,12.6 DA1.21 ; v1(20.8,5.6) C17.2 ; v1(21.325,51.455) 21.338,51.467 21.338,52.338 R25.2 ; v1(25.5,39.4) 25.5,40.341 R12.1 ; DD1.2 28.835,47.715 C31.1 29.15,47.7 v1(29.9,47.7) ; v1(57.7,66) HL4.2
  Top Layer w0.5: C25.1@10.808,41.25 v1(10.808,41.875) ; C25.1@12.208,41.25 v1(12.208,41.875) ; v1(13.3,22.5) 13.3,21.875 13.75,21.425 C8.1 14.25,21.425 14.7,21.875 v1(14.7,22.5) ; C24.1@13.808,41.25 v1(13.808,41.875) ; C24.1@15.209,41.25 v1(15.209,41.875) ; v1(16.3,22.5) 16.3,21.875 16.75,21.425 C10.1 17.25,21.425 17.7,21.875 v1(17.7,22.5) ; DA2.6 19.873,39.635 DA2.9 ; v1(19.3,22.5) 19.3,21.875 19.75,21.425 C12.1 20.25,21.425 20.7,21.875 v1(20.7,22.5) ; v1(22.3,22.5) 22.3,21.875 22.75,21.425 C14.1 23.25,21.425 23.7,21.875 v1(23.7,22.5) ; DA2.2 21.143,38.365 DA2.9 ; DA2.3 21.143,39.635 DA2.9 ; v1(25.6,47.7) 25.607,47.707 26.718,47.707 DD1.2 ; v1(26.7,51) 26.713,50.987 26.713,50.267 DD1.4 27.928,50.255 27.973,50.3 v1(28,50.3) ; v1(40.8,40) 40.8,39.25 41.25,38.8 C35.1 41.75,38.8 42.2,39.25 v1(42.2,40) ; C36.1@43.8,39.25 v1(43.8,40) ; C36.1@45.2,39.25 v1(45.2,40) ; DA4.6 49.874,37.635 DA4.9 ; C6.1@49,18.477 49.227,18.25 C6.1 ; C6.1@51,18.477 C6.1@51.1,18.477 ; DA4.2 51.144,36.365 DA4.9 ; DA4.3 51.144,37.635 DA4.9 ; C39.1@60,38.831 60.227,38.604 C39.1 ; C39.1@60.897,38.607 C39.1 ; C39.1@61.8,38.831 61.573,38.604 C39.1
  Top Layer w1: v2(14,46.6) C29.2 v2(14,51.3) ; v2(37,45.2) C30.2 v2(37,50.8) ; v2(40.5,62) C34.2 v2(40.5,64.8) ; v2(48,45.2) C32.2 v2(48,50.8) ; v2(59,45.2) C33.2 v2(59,50.8)
  other v1: 16,8 17,8 18,8 24.6,8.9 25.5,8.9 26.4,8.9 27.3,8.9 16,9 17,9 18,9 49,9 51,9 52,9 54,9 55,9 57,9 58,9 60,9 61,9 63,9 64,9 66,9 24.6,11.3 25.5,11.3 26.4,11.3 27.3,11.3 16,14.5 17,14.5 18,14.5 16,15.5 17,15.5 18,15.5 49,19.25 51,19.25 52,19.25 54,19.25 55,19.25 57,19.25 58,19.25 60,19.25 61,19.25 63,19.25 64,19.25 66,19.25 44,27.5 44,28.5 44,29.5 44,30.5 10,31 10,32 10,33 10,34 49.5,34.5 50.5,34.5 51.5,34.5 50,35.5 51,35.5 19.5,36.5 20.5,36.5 21.5,36.5 20,37.5 21,37.5 50,39 51,39 60,39.6 60.897,39.597 61.8,39.6 62.997,39.597 63.893,39.593 64.797,39.597 49.5,40 50.5,40 51.5,40 20.5,41 20,42 21,42 29.5,42 30.5,42 31.5,42 32.5,42 33.5,42 34.5,42 19.5,43 20.5,43 21.5,43
HB: C20.1 DA1.18 VD1.2 | length 6
  Top Layer w0.3: DA1.18 22.51,13.25 VD1.2 23,14.025 23.6,14.625 C20.1
HO: DA1.19 VT3.4 | length 15.1
  Top Layer w0.2: VT3.4 VT3.4@32.987,15
  Top Layer w0.3: DA1.19 v1(21.4,13.9) ; VT3.4@32.987,15 v1(33.7,15)
  Bottom Layer w0.3: v1(21.4,13.9) 22.5,15 v1(33.7,15)
LO: DA1.15 VT4.4 | length 20.5
  Top Layer w0.2: VT4.4@32.7,7.287 VT4.4 VT4.4@32.923,7.1
  Top Layer w0.3: DA1.15 20,11.225 20.795,11.225 21.243,10.777 21.243,10.657 v1(21.3,10.6) ; v1(22.5,11.4) 23.4,12.3 27.7,12.3 28.1,11.9 v1(28.1,8.8) ; VT4.4@32.923,7.1 v1(34,7.1)
  Bottom Layer w0.3: v1(21.3,10.6) 22.1,11.4 v1(22.5,11.4) ; v1(28.1,8.8) 29.8,7.1 v1(34,7.1)
NetC26_1: C26.1 DA2.8 L2.1 VD3.2 | length 5.8
  Top Layer w0.2: VD3.2 17.475,35 C26.1
NetC26_2: C26.2 DA2.1 VD2.2 | length 5.9
  Top Layer w0.3: C26.2 21.308,35.075 21.608,35.375 22.075,35.375 22.7,36 22.7,36.945 22.85,37.095 DA2.1 24.133,37.095 24.948,37.91 24.948,37.92 25.028,38 VD2.2
NetC30_1: C30.1 C32.1 C33.1 L4.1 R24.2 R26.1 VD4.2 | length 12
  Top Layer w0.2: R26.1 R24.2 27.35,52.275 28.05,51.575 29.174,51.575 29.8,52.201 v1(29.8,53.7) ; VD4.2 31,57.925 31.8,57.125 31.8,56.2 v1(31.2,55.6)
  Bottom Layer w0.2: v1(29.8,53.7) 31.2,55.1 v1(31.2,55.6)
NetC31_2: C31.2 DD1.3 | length 2.3
  Top Layer w0.3: DD1.3 28.835,48.985 C31.2
NetC37_1: C37.1 DA4.8 L5.1 VD6.2 | length 3.9
  Top Layer w0.2: DA4.8 47.75,35.036 47.75,33.25 48,33 C37.1
NetC37_2: C37.2 DA4.1 VD5.2 | length 6
  Top Layer w0.3: C37.2 51.309,33.075 51.609,33.375 52.232,33.375 52.584,33.726 52.584,34.945 52.734,35.095 54.095,35.095 54.92,35.92 55.239,35.92 VD5.2
NetDA2_4: DA2.4 R12.2 R13.1 | length 4.7
  Top Layer w0.3: DA2.4 24.105,40.905 24.85,41.65 R12.2 ; R12.2@25.439,41.65 R13.1
NetDA2_5: DA2.5 R11.1 | length 2.3
  Top Layer w0.2: DA2.5 17.959,40.905 18.159,41.105 R11.1
NetDA3_1: DA3.1 DD1.5 R21.2 R22.1 R24.1 | length 18.9
  Top Layer w0.2: DD1.5 19.145,50.255 18.05,51.35 DA3.1 18.245,52.4 18.245,52.945 18.661,53.361 21.35,53.361 ; R22.1 21.35,53.361 ; R24.1 28.65,53.361 ; R21.2 28.65,53.361 ; 21.35,53.361 28.65,53.361
NetDA3_3: DA3.3 R25.1 R26.2 | length 6.6
  Top Layer w0.2: DA3.3 20.039,52.116 20.039,51.326 20.511,50.855 22.155,50.855 22.65,51.35 R25.1 R26.2
NetDA3_4: DA3.4 R22.2 R27.2 | length 6
  Top Layer w0.2: DA3.4 20.139,54.684 20.139,55.255 20.384,55.5 22.166,55.5 22.4,55.266 22.4,54.6 R22.2 R27.2
NetDA4_4: DA4.4 R29.2 R30.1 | length 4.7
  Top Layer w0.3: DA4.4 54.105,38.905 54.85,39.65 R29.2 ; R29.2@55.439,39.65 R30.1
NetDA4_5: DA4.5 R28.1 | length 2.3
  Top Layer w0.2: DA4.5 47.959,38.905 48.159,39.105 R28.1
NetDD1_1: DD1.1 L3.2 VD4.1 | length 26
  Top Layer w0.5: DD1.1 28.155,46.445
  Top Layer w0.6: VD4.1@30.885,62.35 VD4.1
  Top Layer w0.8: 28.155,46.445 30.445,46.445 31.4,47.4 31.4,54 27.9,57.5 27.9,61.35 L3.2 VD4.1@30.885,62.35
NetDD1_7: DD1.7 L3.1 R20.1 R23.2 | length 23.2
  Top Layer w0.5: 19.7,47.933 19.925,47.933 20.143,47.715 DD1.7
  Top Layer w0.8: R20.1 L3.1@16.44,63.01 ; L3.1 16.3,61.55 16.3,49.737 18.037,48 R23.2@19.075,48 ; R23.2 19.7,48
  Top Layer w1: L3.1@16.44,63.01 L3.1
NetDD1_8: DD1.8 R23.1 | length 2.4
  Top Layer w0.3: R23.1 19.154,46.546 20.667,46.546 20.769,46.445 DD1.8
NetHL1_1: HL1.1 R14.1 | length 2.3
  Top Layer w0.2: HL1.1 R14.1
NetHL2_1: HL2.1 R15.1 | length 2.4
  Top Layer w0.2: HL2.1 R15.1
NetHL3_1: HL3.1 R16.1 | length 2.3
  Top Layer w0.2: HL3.1 66.7,29.7 66.7,30.975 67.15,31.425 R16.1
NetHL4_1: HL4.1 R17.1 | length 2.3
  Top Layer w0.2: HL4.1 R17.1
NetHL5_1: HL5.1 R18.1 | length 2.3
  Top Layer w0.2: R18.1 HL5.1
NetHL6_1: HL6.1 R19.1 | length 2.4
  Top Layer w0.2: HL6.1 R19.1
NetVT1_3: VT1.3 VT2.1 | length 2.1
  Top Layer w0.2: VT1.3 5.923,18.623 VT2.1
R4_C2: C2.2 R5.1 | length 4
  Top Layer w0.2: R5.1 7.65,7.325 7.65,7.034 7.984,6.7 9.6,6.7 9.85,6.95 9.85,7.275 C2.2
RAMP: C3.2 DA1.5 R7.2 | length 9.2
  Top Layer w0.2: v1(12.9,11.9) 12.925,11.925 14.05,11.925 DA1.5 ; v1(14.9,7.8) C3.2@14.9,6.725 ; C3.2@15.1,6.925 C3.2@14.9,6.725 ; R7.2 C3.2 C3.2@14.9,6.725
  Bottom Layer w0.2: v1(12.9,11.9) 12.9,9.8 v1(14.9,7.8)
RT/SYNC: DA1.3 R4.2 | length 2.6
  Top Layer w0.2: R4.2 11.65,13.55 11.95,13.25 DA1.3
SS: C4.2 DA1.7 | length 2.7
  Top Layer w0.2: C4.2 11.8,11.55 12.15,11.2 12.6,11.2 13.15,10.65 DA1.7
SW: C20.2 DA1.20 L1.1 VT3.1 VT3.2 VT3.3 VT4.5 VT4.6 VT4.7 VT4.8 VT4.9 | length 10.4
  Top Layer w0.3: DA1.20 21.505,14.55 22.455,15.5 26.149,15.5 26.5,15.149 26.5,14.925 C20.2 28.94,14.625 29.095,14.78 VT3.1
UVLO: DA1.2 R1.2 R2.1 R3.2 VT2.3 | length 12.1
  Top Layer w0.2: R3.2 8.65,14.625 ; VT2.3 9.225,18.559 9.225,17.625 ; R2.1 9.225,17.625 ; DA1.2 13.041,13.9 12.316,14.625 8.65,14.625 ; 8.65,14.625 R1.2 8.65,17.05 9.225,17.625
VCC_16: C17.1 DA1.16 R7.1 VD1.1 | length 11.4
  Top Layer w0.3: R7.1 C17.1 19.5,6.925 19.5,7.249 20.094,7.843 20.243,7.843 v1(20.3,7.9) ; DA1.16 20.87,11.95 23,9.82 VD1.1 ; v1(21.8,9.5) 22.99,9.5 VD1.1 ; VD1.1@23,9.2 VD1.1
  Bottom Layer w0.3: v1(20.3,7.9) 20.3,7.95 21.8,9.45 v1(21.8,9.5)

## Polygon pours and split planes (outlines as drawn)
GND on Top Layer "NONET_L-01_P-001" (solid, pour order 24): 45.75,31 43.25,31 43.25,27 45.75,27
NetC37_1 on Top Layer "NONET_L-01_P-001" (solid, pour order 23): 48.75,35.5 48.75,30.25 55,30.25 55,27.75 46.75,27.75 46.75,35.5
+16В on Top Layer "NONET_L-01_P-001" (solid, pour order 8): 43,31.4 44.4,31.4 45.6,32.6 45.6,36.6 40.3,36.6 38.25,34.55 38.25,26.5 35.4,26.5 33.8,28.1 21.144,28.1 21.044,28 19.191,29.8 9.1,29.8 8.9,30 8.9,35.3 14.7,35.3 15.7,36.3 15.7,38 15.4,38.3 10.6,38.3 9.9,39 9.9,43.9 23.5,43.9 24.1,44.5 24.1,49.5 22.7,49.5 22.7,45.7 22.5,45.5 9.9,45.5 9.9,49.6 12.6,52.3 14.8,52.3 14.8,55.5 14.7,55.6 14.7,61 2,61 2,23.5 24,23.5 24.5,23 24.5,20 13,20 13,16.3 33.7,16.3 33.7,18.2 34.7,18.2 45.2,18.2 48,21 66.8,21 67.9,19.9 70.4,19.9 70.9,20.4 70.9,21.7 71.5,22.3 73,22.3 73.6,22.9 73.6,29.3 73.1,29.8 71.6,29.8 71.1,29.3 71.1,27.9 70.5,27.3 69.3,27.3 67.9,25.9 48.6,25.9 48.5,26 43.5,26 43,26.5
NetC26_1 on Top Layer "NONET_L-01_P-001" (solid, pour order 21): 18.75,37.5 18.75,33.5 24.25,33.5 25,32.75 25,31.25 16.75,31.25 15.5,32.5 15.5,35 16.5,35 17,35.5 17,37.5
+12В_servo on Top Layer "NONET_L-01_P-001" (solid, remove dead copper, pour order 1): 70.5,12 71,11.5 71,10.4 71.6,9.8 73,9.8 73.6,10.4 73.6,21.5 73,22.1 71.7,22.1 71.1,21.5 71.1,20.2 70.6,19.7 69.1,19.7 68.2,18.8 66.4,17 44.7,17 44.7,11.2 68.3,11.2 69.1,12
+5В on Top Layer "NONET_L-01_P-001" (solid, pour order 9): 73,45 73.4,44.6 73.4,43.2 73,42.8 71.3,42.8 71,42.5 71,40.6 70.4,40 69,40 67.9,41.1 50.4,41.1 49.8,41.7 41.6,41.7 39.4,39.5 39.4,39.4 34.6,34.6 34.6,28.6 31.4,28.6 29.1,30.9 29.1,39 35,39 40.2,44.2 59.7,44.2 60.5,45
SW on Top Layer "NONET_L-01_P-001" (solid, pour order 3): 34.9,14 34.9,16.8 37.6,16.8 37.5,16.7 37.5,11.8 29,11.8 28.8,12 28.8,15.7 31.9,15.7 31.9,14.5 32.4,14
GND on Top Layer "NONET_L-01_P-001" (solid, pour order 4): 15.5,7.6 18.5,7.6 18.5,15.9 15.5,15.9
GND on Top Layer "NONET_L-01_P-001" (solid, pour order 5): 48.6,17.8 48.6,20.1 66.4,20.1 66.4,17.8
GND on Top Layer "NONET_L-01_P-001" (solid, pour order 6): 66.4,10.45 66.4,8 48.6,8 48.6,10.45
GND on Top Layer "NONET_L-01_P-001" (solid, pour order 20): 24.1,11.2 24.1,11.8 27.7,11.8 27.7,10.8 27.6,10.7 27.6,9 27.6,8.1 24.1,8.1
NetC30_1 on Top Layer "NONET_L-01_P-001" (solid, pour order 12): 59.9,60.6 55.35,60.6 50.8,60.6 30,60.6 30,57.5 34.8,52.7 61.9,52.7 61.9,58.6
+12В on Top Layer "NONET_L-01_P-001" (solid, pour order 10): 73,37.4 73.5,36.9 73.5,35.6 73.1,35.2 71.5,35.2 71,34.7 71,33 70.5,32.5 65.5,32.5 65.3,32.5 64.6,31.8 64.6,26.6 61.4,26.5 59.6,28.3 59.6,36.7 67.4,36.7 68.1,37.4
CS on Top Layer "NONET_L-01_P-001" (solid, pour order 19): 24.6,7.8 32.2,7.8 32.2,5.8 24.6,5.8
GND on Top Layer "NONET_L-01_P-001" (solid, pour order 11): 19.1,43.4 22.3,43.4 22.3,41.8 21.6,41.1 21.6,37.2 21.9,36.9 21.9,36 19.1,36 19.1,37.1 19.4,37.4 19.4,41.5 19.1,41.8
GND on Top Layer "NONET_L-01_P-001" (solid, pour order 17): 59.5,38.1 65.3,38.1 65.3,40 59.5,40
GND on Top Layer "NONET_L-01_P-001" (solid, pour order 15): 49,34 52,34 52,35.5 51.6,35.9 51.6,38.7 52.8,39.9 52.8,40.7 49,40.7 48.9,40.6 48.9,38.9 49.4,38.4 49.4,35.8 49,35.4
GND on Top Layer "NONET_L-01_P-001" (solid, pour order 14): 29.1,40 29.1,42.5 35,42.5 35,40
+25В on Top Layer "NONET_L-01_P-001" (solid, pour order 13): 73,61.5 73.5,61 73.5,58.5 73,58 68.5,58 64.9,61.6 43.9,61.6 43.9,64.7 66.3,64.7 69.5,61.5
GND on Top Layer "NONET_L-01_P-001" (solid, pour order 7): 11.75,34.5 9.25,34.5 9.25,30.5 11.75,30.5
GND on Bottom Layer "GND_L02_P016" (solid, remove dead copper, pour order 16): 4,0 cw(c4,4) 0,4 0,66 cw(c4,66) 4,70 71,70 cw(c71,66) 75,66 75,4 cw(c71,4) 71,0

## Keep-outs
Keep-Out Layer:
  circle w0.8: c4,66 r3
  circle w0.8: c71,66 r3
  circle w0.8: c71,4 r3
  circle w0.8: c4,4 r3

## Silkscreen, mask and mechanical layers (free items; w line width, h text height)
Top Overlay:
  circle w0.2: c52.7,34.3 r0.1
  circle w0.2: c22.7,36.3 r0.1
  lines w0.15: 9.7,0.6 12.3,0.6 12.3,0.8 12.3,6.8 9.7,6.8 9.7,0.6
  text "25V" at 52.174,65 h2.5
  text "Hydronautics" at 3.967,50.2 h1 r90
  text "V 1.0" at 2.8,43.2 h1 r90
  text "5V" at 35.755,37 h2.5
  text "DCDC SAUVC26" at 2.8,29.7 h1 r90
  text "Developed by Gleb M." at 5.967,29.7 h1 r90
  text "16V" at 1.174,23 h2.5
  text "12V" at 63.241,21.5 h2.5
  text "ENABLE" at 29.984,1.5 h2.5
  text "12V SERVO" at 49.314,1.5 h2.5
Mechanical 4 (Mech4):
  the board outline again, w0.2